# Altium PCB PCB1.PcbDoc
Units mm, origin at the board's own origin, x right, y up, seen from the top; angles counter-clockwise.
Board outline 171.32 x 126.62 mm, 2 copper layers (Top Layer, Bottom Layer); 40 components, 49 nets, 217 pads, 0 vias.
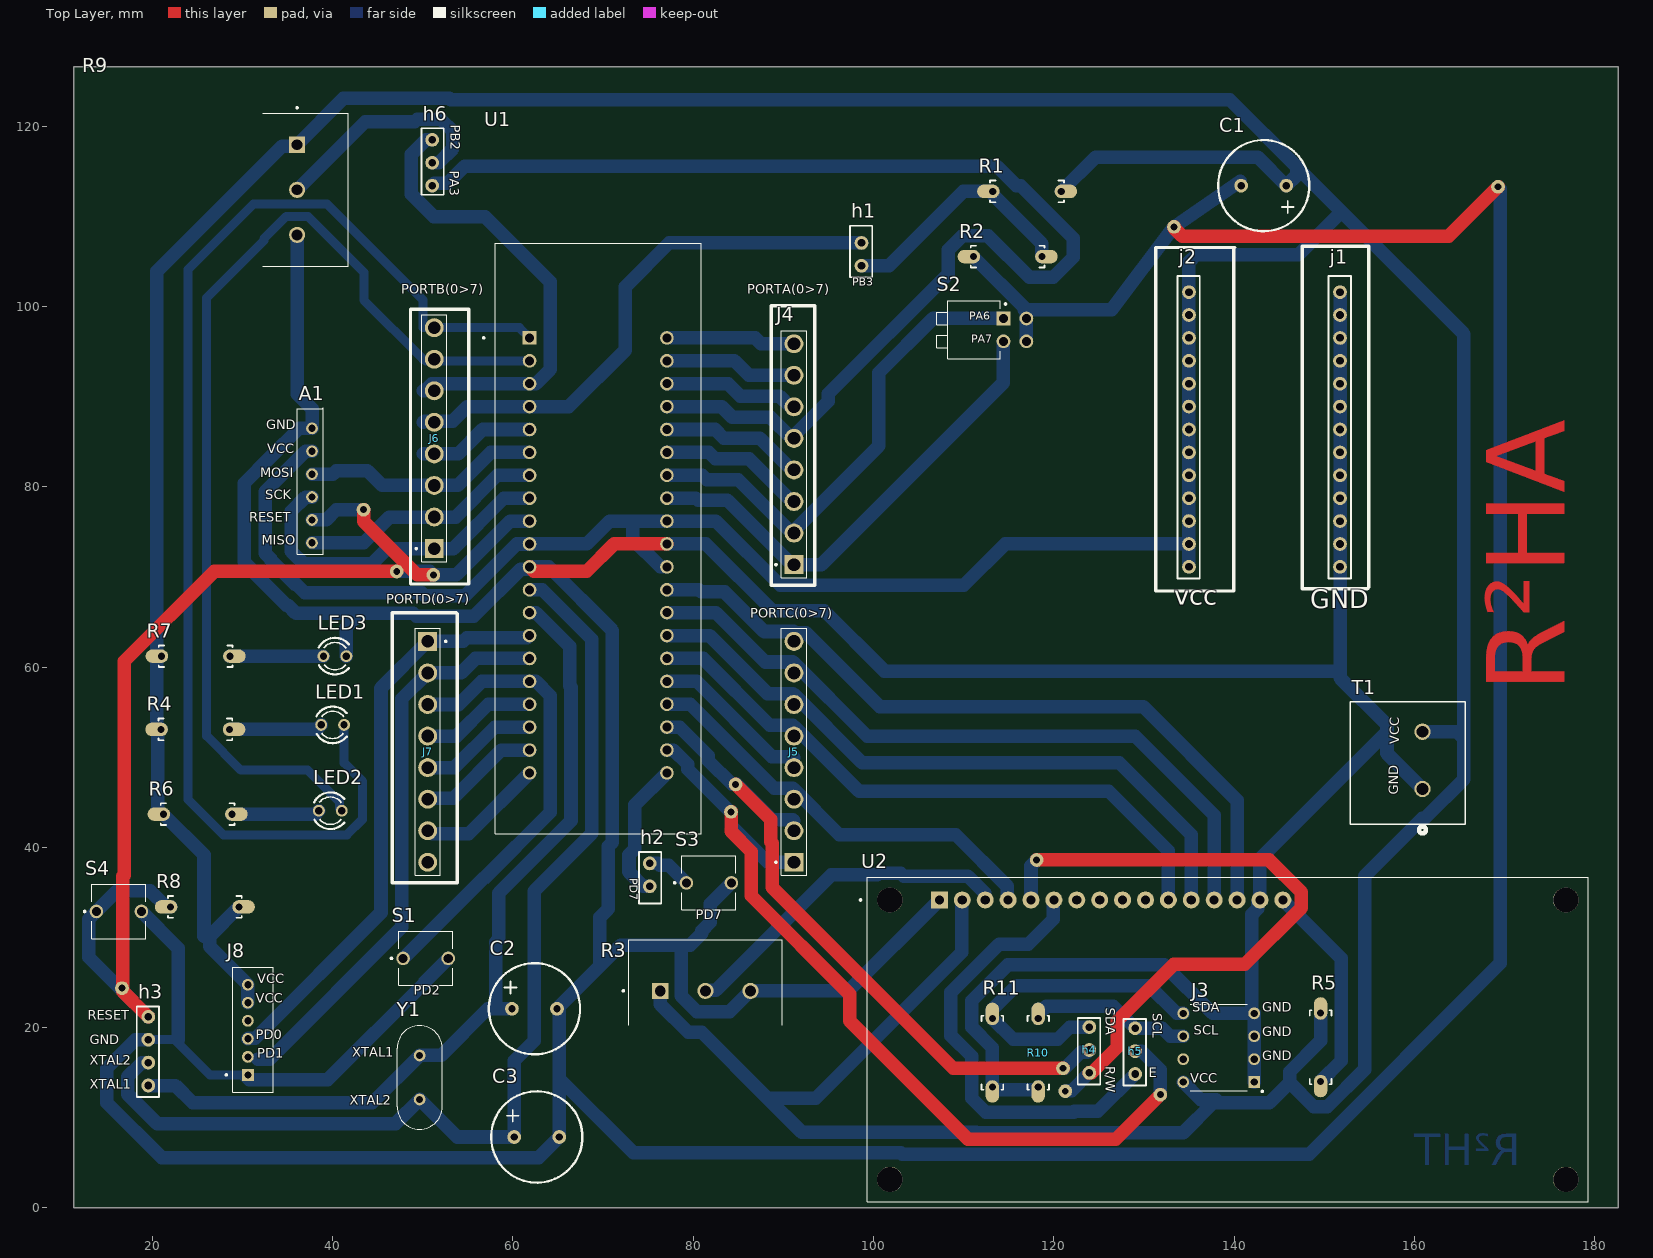
[diagram p0: Top Layer view]
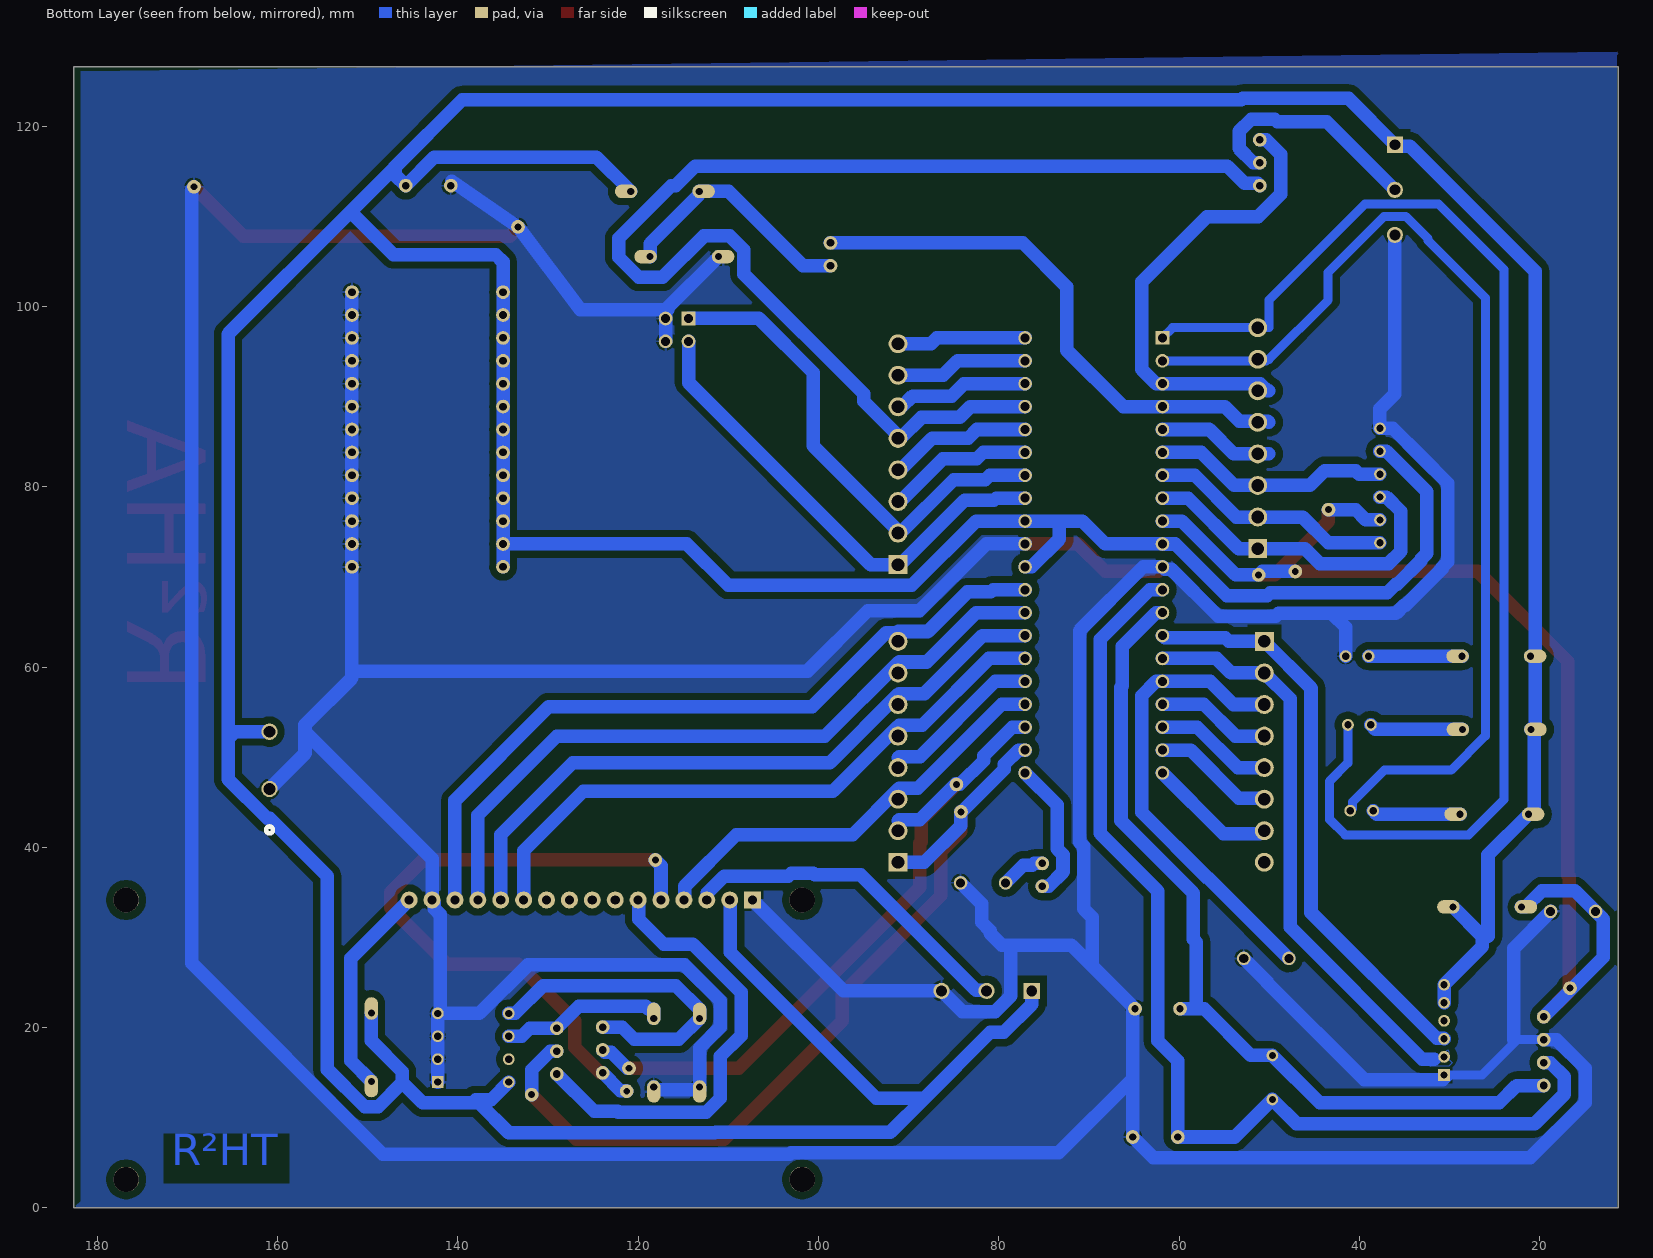
[diagram p1: Bottom Layer view, seen from below]

## Layer stack, top to bottom
Top Solder: solder mask 0.0102, Solder Resist, Dk 3.5
Top Layer: signal copper 0.0356
Dielectric 1: dielectric 0.32, FR-4, Dk 4.8
Bottom Layer: signal copper 0.0356
Bottom Solder: solder mask 0.0102, Solder Resist, Dk 3.5

## Board outline
11.303,0 182.626,0 182.626,126.619 11.303,126.619

## Design rules (kind name [scope] priority, off if disabled: settings)
Clearance [All] p1: gap=0.8 ignorepadtopadclearanceinfootprint=FALSE except(0.3: Arc-SMDPad Arc-THPad Track-SMDPad Track-THPad SMDPad-SMDPad SMDPad-THPad THPad-THPad)
ComponentClearance [All] p1: gap=0 collisioncheckmode=3 verticalgap=0 showdistances=TRUE donotcheckwithout3dbody=TRUE checkcomponentboundary=TRUE
PolygonConnect [All] p1: connectstyle=Relief reliefconductorwidth=0.254 reliefentries=4 polygonreliefangle="90 Angle" airgapwidth=0.254
RoutingVias [All] p1: holewidth=0.711 width=1.27 viastyle="Through Hole" minholewidth=0.711 minwidth=1.27 maxholewidth=0.711 maxwidth=1.27
SolderMaskExpansion [All] p1: expansion=0.102 istentingtop=FALSE
SupplyNets "Schematic Supply Nets" [InNet('GND')] p1: voltage=0.000
Width [All] p1: maxlimit=2 minlimit=0.254 preferedwidth=1.5 minimp=50.000000 maximp=50.000000 favimp=50.000000
29 further rules are at their usual default settings.

## Components (designator, comment, footprint, x,y, rotation, side; value= is the part's Value field where it differs from the comment)
A1 "AVR-ISP" AVR-ISP 36.449,76.327 r90 top
C1 "cap" cap 143.296,113.411 r180 top
C2 "cap" cap 62.397,22.098 r0 top
C3 "cap" cap 62.651,7.874 r0 top
h1 "header-3" Male_header_3 98.679,104.521 r90 top
h2 "header-3" Male_header_3 75.184,38.227 r270 top
h3 "header-5" Male_header_5 19.558,13.589 r90 top
h4 "header-4" Male_header_4 123.952,14.986 r90 top
h5 "header-4" Male_header_4 129.032,14.859 r90 top
h6 "header-4" Male_header_4 51.054,118.491 r270 top
j1 "header-12" "male header 8x2.54" 151.765,71.12 r90 top
j2 "header-12" "male header 8x2.54" 135.001,71.12 r90 top
J3 "24LC04B/P" DIP787W46P254L927H533Q8 138.303,17.78 r180 top
J4 "1986717-8" TE_1986717-8 91.186,83.624 r90 top
J5 "1986717-8" TE_1986717-8 91.186,50.604 r90 top
J6 "1986717-8" TE_1986717-8 51.283,85.402 r90 top
J7 "1986717-8" TE_1986717-8 50.546,50.604 r270 top
J8 "B6B-PH-K_1" JST_B6B-PH-K 31.157,19.764 r270 top
LED1 "TLLR4400" LED3MM 40.005,53.594 r0 top
LED2 "TLLR4400" LED3MM 39.751,44.069 r0 top
LED3 "TLLR4400" LED3MM 40.259,61.214 r0 top
R1 "1k" R_THT_CFR-25 114.046,112.776 r0 top
R2 "1k" R_THT_CFR-25 111.887,105.537 r0 top
R3 "PTN16-A50220K1B1" POT_PTN16-A50220K1B1 76.36,24.085 r0 top
R4 "1k" R_THT_CFR-25 21.775,53.086 r0 top
R5 "1k" R_THT_CFR-25 149.606,20.828 r270 top
R6 "1k" R_THT_CFR-25 22.029,43.688 r0 top
R7 "1k" R_THT_CFR-25 27.813,61.214 r180 top
R8 "1k" R_THT_CFR-25 28.829,33.401 r180 top
R9 "PTN16-A50220K1B1" POT_PTN16-A50220K1B1 36.068,117.95 r270 top
R10 "1k" R_THT_CFR-25 118.275,14.224 r90 top
R11 "1k" R_THT_CFR-25 113.195,14.224 r90 top
S1 "BUTT-2" SW_BUTT-2 50.332,27.686 r0 top
S2 "KAS2102E" SW_KAS2102E 115.697,97.409 r270 top
S3 "BUTT-2" SW_BUTT-2 81.748,36.068 r0 top
S4 "BUTT-2" SW_BUTT-2 16.296,32.893 r0 top
T1 "terminal 2" CONN2_0393800102_524X492_MOL 160.909,46.482 r270 top
U1 "ATMEGA32A-PU" 3M_240-1280-00-0602J 69.469,72.39 r0 top
U2 "LCD-16X2" MODULE_LCD-16X2 139.319,18.669 r0 top
Y1 "CA-18.432-18-3050-X" XTAL_CA-18.432-18-3050-X 49.657,14.478 r90 top

## Footprints (in the part's own frame and the unit in brackets; to place one, negate y for a bottom-side part, rotate by r counter-clockwise, add the part's x,y. Pads: shape width x height; smd on the part's side, far side on the other; paste and mask are expansions set on the pad)
3M_240-1280-00-0602J [mm]
  rect 1.508x1.508 / inner round 1.508 / far side rect 1.508x1.508 hole 1: 1(-7.62,24.13)
  round 1.508 hole 1: 2(-7.62,21.59) 3(-7.62,19.05) 4(-7.62,16.51) 5(-7.62,13.97) 6(-7.62,11.43) 7(-7.62,8.89) 8(-7.62,6.35) 9(-7.62,3.81) 10(-7.62,1.27) 11(-7.62,-1.27) 12(-7.62,-3.81) 13(-7.62,-6.35) 14(-7.62,-8.89) 15(-7.62,-11.43) 16(-7.62,-13.97) 17(-7.62,-16.51) 18(-7.62,-19.05) 19(-7.62,-21.59) 20(-7.62,-24.13) 21(7.62,-24.13) 22(7.62,-21.59) 23(7.62,-19.05) 24(7.62,-16.51) 25(7.62,-13.97) 26(7.62,-11.43) 27(7.62,-8.89) 28(7.62,-6.35) 29(7.62,-3.81) 30(7.62,-1.27) 31(7.62,1.27) 32(7.62,3.81) 33(7.62,6.35) 34(7.62,8.89) 35(7.62,11.43) 36(7.62,13.97) 37(7.62,16.51) 38(7.62,19.05) 39(7.62,21.59) 40(7.62,24.13)
  silkscreen extent -12.8,-30.87 11.45,34.63, body extent -11.62,-30.35 12.13,35.18, height 23.62
AVR-ISP [mm]
  round 1.308 hole 0.8: GND(10.16,-1.27) MISO(-2.54,-1.27) MOSI(5.08,-1.27) RST(0,-1.27) SCK(2.54,-1.27) VCC(7.62,-1.27)
  silkscreen extent -3.81,-2.54 12.45,0.38
cap [mm]
  round 1.524 hole 0.8: 1(-2.5,0) 2(2.5,0)
  silkscreen extent -5.06,-5.06 5.06,5.06, body extent -4.93,-5 5.06,5, height 12.5
CONN2_0393800102_524X492_MOL [mil]
  round 71 hole 51: 1(0,0) 2(-250,0)
  silkscreen extent -380,-316 194,186
DIP787W46P254L927H533Q8 [mm]
  rect 1.308x1.308 / inner round 1.308 / far side rect 1.308x1.308 hole 0.8 mask+0.102: 1(-3.935,3.81)
  round 1.308 hole 0.8 mask+0.102: 2(-3.935,1.27) 3(-3.935,-1.27) 4(-3.935,-3.81) 5(3.935,-3.81) 6(3.935,-1.27) 7(3.935,1.27) 8(3.935,3.81)
  silkscreen extent -4.95,-4.8 3.18,4.95, body extent -4.19,-4.89 4.19,4.89, height 4.32
JST_B6B-PH-K [mm]
  rect 1.308x1.308 / inner round 1.308 / far side rect 1.308x1.308 hole 0.8: 1(5,-0.55)
  round 1.308 hole 0.8: 2(3,-0.55) 3(1,-0.55) 4(-1,-0.55) 5(-3,-0.55) 6(-5,-0.55)
  silkscreen extent -6.95,-3.05 6.95,2.25, body extent -6.95,-2.8 6.95,1.7, height 6
LED3MM [mil]
  round 52 hole 32: A(-50,0) K(50,0)
  silkscreen extent -71,-80 61,80, body extent -60,-62 60,62, height 240
"male header 8x2.54" [mil]
  round 60 hole 33.46: 0(0,0) 1(100,0) 2(200,0) 3(300,0) 4(400,0) 5(500,0) 6(600,0) 7(700,0) 8(800,0) 9(900,0) 10(1000,0) 11(1100,0) 12(1200,0)
  silkscreen extent -50,-47 1270,50, body extent -324,-53 1249,49, height 348
Male_header_3 [mil]
  round 60 hole 33.46: 0(0,0) 1(100,0)
  silkscreen extent -50,-47 175,50
Male_header_4 [mil]
  round 60 hole 33.46: 0(0,0) 1(100,0) 2(200,0)
  silkscreen extent -50,-47 240,50
Male_header_5 [mil]
  round 60 hole 33.46: 0(0,0) 1(100,0) 2(200,0) 3(300,0)
  silkscreen extent -50,-47 345,50
MODULE_LCD-16X2 [mm]
  rect 1.88x1.88 / inner round 1.88 / far side rect 1.88x1.88 hole 1.016: 1(-32,15.5)
  round 1.88 hole 1.016: 2(-29.46,15.5) 3(-26.92,15.5) 4(-24.38,15.5) 5(-21.84,15.5) 6(-19.3,15.5) 7(-16.76,15.5) 8(-14.22,15.5) 9(-11.68,15.5) 10(-9.14,15.5) 11(-6.6,15.5) 12(-4.06,15.5) 13(-1.52,15.5) 14(1.02,15.5) 15(3.56,15.5) 16(6.1,15.5)
  round 2.8 hole 2.8 unplated: ""(-37.5,-15.5) ""(-37.5,15.5) ""(37.5,-15.5) ""(37.5,15.5)
  silkscreen extent -40.85,-18 40,18
POT_PTN16-A50220K1B1 [mm]
  rect 1.8x1.8 / inner round 1.8 / far side rect 1.8x1.8 hole 1.2: 1(0,0)
  round 1.8 hole 1.2: 2(5,0) 3(10,0)
  silkscreen extent -4.2,-3.81 13.5,5.69, body extent -7.3,-8.5 22.2,8.5, height 8.5
R_THT_CFR-25 [mm]
  oval 2.5x1.5 hole 0.8 copper offset -0.5,0: 1(-0.8,0)
  oval 2.5x1.5 hole 0.8 copper offset 0.5,0: 2(6.8,0)
  silkscreen extent -1.1,-1.2 7.1,1.2, body extent -1.08,-1.2 7.09,1.2, height 1.9
SW_BUTT-2 [mm]
  round 1.508 hole 1 mask+0.102: 1(-2.5,0) 2(2.5,0)
  silkscreen extent -3.9,-3 3,3, body extent -3,-3 3,3, height 5.1
SW_KAS2102E [mm]
  rect 1.53x1.53 / inner round 1.53 / far side rect 1.53x1.53 hole 1.02 mask+0.102: 1(-1.27,-1.27)
  round 1.53 hole 1.02 mask+0.102: 2(-1.27,1.27) 3(1.27,-1.27) 4(1.27,1.27)
  silkscreen extent -3.22,-8.67 3.22,-0.95, body extent -3.22,-4.13 3.22,5.91, height 4.95
TE_1986717-8 [mm]
  rect 2.1x2.1 / inner round 2.1 / far side rect 2.1x2.1 hole 1.4: 1(-12.25,0)
  round 2.1 hole 1.4: 2(-8.75,0) 3(-5.25,0) 4(-1.75,0) 5(1.75,0) 6(5.25,0) 7(8.75,0) 8(12.25,0)
  silkscreen extent -13.7,-1.4 13.7,2.1
XTAL_CA-18.432-18-3050-X [mm]
  round 1.308 hole 0.8 mask+0.102: 1(-2.44,0) 2(2.44,0)
  silkscreen extent -5.75,-2.5 5.75,2.5, body extent -5.75,-2.5 5.75,2.5, height 3.7

## Part data
A1: "Emulators / Simulators AVR USB IN CIRCUIT EMUL/PRGMR ISP", Package=None, Availability=Unavailable, MF=Gravitech, MP=AVR-ISP, Price=None, SnapEDA_Link=https://www.snapeda.com/parts/AVR-ISP/Gravitech/view-part/4593377/?ref=snap
J3: "4K, 512 X 8 2.5V SERIAL EEPROM", Package="DIP-8 Microchip", Check_prices=https://www.snapeda.com/parts/24LC04B/P/Microchip+Technology/view-part/?ref=eda, MF=Microchip, MP=24LC04B/P, SnapEDA_Link=https://www.snapeda.com/parts/24LC04B/P/Microchip+Technology/view-part/?ref=snap
J4 J5 J6 J7: "8 Position Terminal Block Header, Male Pins, Unshrouded 0.138 (3.50mm) Vertical - Through Hole", Package=None, Centerline_Pitch="3.5 mm[.138 in]", Check_prices=https://www.snapeda.com/parts/1986717-8/TE+Connectivity+AMP+Connectors/view-part/?ref=eda, MF="TE Connectivity", MP=1986717-8, Number_of_Positions=8, SnapEDA_Link=https://www.snapeda.com/parts/1986717-8/TE+Connectivity+AMP+Connectors/view-part/?ref=snap
J8: "Conn Shrouded Header (4 Sides) HDR 6 POS 2mm Solder ST Top Entry Thru-Hole Box", Package=None, Check_prices=https://www.snapeda.com/parts/B6B-PH-K/JST/view-part/?ref=eda, MF="JST Corporation", MP=B6B-PH-K, SnapEDA_Link=https://www.snapeda.com/parts/B6B-PH-K/JST/view-part/?ref=snap
LED1 LED2 LED3: "Red 619nm LED Indication - Discrete 1.9V Radial", Package=None, Check_prices=https://www.snapeda.com/parts/TLLR4400/Vishay+Semiconductor+Opto+Division/view-part/?ref=eda, MF=Vishay, MP=TLLR4400, SnapEDA_Link=https://www.snapeda.com/parts/TLLR4400/Vishay+Semiconductor+Opto+Division/view-part/?ref=snap
R1 R2 R4 R5 R6 R7 R8 R10 R11: library part "TH CFR-25 Resis", "CFR Series 0.25 W 1 KOhm ±5 % -350 to 500 ppm/°C Carbon Film Resistor", Case/Package=Axial, Manufacturer 1=Yageo, Manufacturer Part Number 1=CFR-25JB-52-1K, Max Operating Temperature=155°C, Max Power Dissipation=250mW, Min Operating Temperature=-55°C, Package Quantity=200, Resistance=1kR, Resistor Type="Carbon Film", Supplier Part Number 1=1.0KQBK-ND, Temperature Coefficient=500ppm/°C, Tolerance=5%, ComponentLink1Description=http://www.yageo.com/NewPortal/yageodocoutput?fileName=/pdf/throughhole/Yageo_LR_CFR_2013.pdf&src-supplier=Digi-Key, ComponentLink1URL=http://www.yageo.com/NewPortal/yageodocoutput?fileName=/pdf/throughhole/Yageo_LR_CFR_2013.pdf&src-supplier=Digi-Key, ComponentLink2Description=http://www.yageo.com/documents/recent/General%20Type_CFR.pdf?src-supplier=Future+Electronics, ComponentLink2URL=http://www.yageo.com/documents/recent/General%20Type_CFR.pdf?src-supplier=Future+Electronics, Lead Free="Lead Free", Length=0.248inch, Number of Terminations=2, Parameter Name 1=Bulk, Power Rating=250mW, Pricing 1="1=0.10000, 25=0.04680, 50=0.03640, 100=0.02600, 250=0.02028, 500=0.01612, 750=0.01379, 1000=0.01144, 2000=0.00988 (USD)", RoHS=Yes, Stock 1=194074, Supplier 1=Digi-Key
R3 R9: "16.5 mm, Horizontal, Linear, 50 kÎ©, Through Hole, Knurled Shaft Single Section Rotary Potentiometer", Package=Package, Check_prices=https://www.snapeda.com/parts/PTN16-A50220K1B1/Same+Sky/view-part/?ref=eda, MF="Same Sky", MP=PTN16-A50220K1B1, SnapEDA_Link=https://www.snapeda.com/parts/PTN16-A50220K1B1/Same+Sky/view-part/?ref=snap
S1 S3 S4: "Tactile Switches MINI PUSH BUTTON SWITCH 2-PIN QTY. 4", Package=None, Check_prices=https://www.snapeda.com/parts/BUTT-2/Gravitech/view-part/?ref=eda, MF=Gravitech, MP=BUTT-2, SnapEDA_Link=https://www.snapeda.com/parts/BUTT-2/Gravitech/view-part/?ref=snap
S2: "Dip Switch SPST 2 Position Through Hole, Right Angle Slide (Standard) Actuator 25mA 24VDC", Package=None, Check_prices=https://www.snapeda.com/parts/KAS2102E/E-Switch/view-part/?ref=eda, MF=E-Switch, MP=KAS2102E, SnapEDA_Link=https://www.snapeda.com/parts/KAS2102E/E-Switch/view-part/?ref=snap
T1: Flammability Rating="UL94 V-0", LCSC Part Number=C6045317, Manufacturer=Samtec, Manufacturer Part Number=FTS-102-01-F-S, Manufacturer Series=FTS, Supplier Part Number=SAM15176-ND, Additional Feature="Low Profile", Category=Connectors, ComponentLink1Description=https://datasheet.ciiva.com:443/pdfs/VipMasterIC/IC/SAMI/SAMI-S-A0001504673/SAMI-S-A0001504673-1.pdf?src-supplier=IHS+Markit, ComponentLink1URL=https://datasheet.ciiva.com:443/pdfs/VipMasterIC/IC/SAMI/SAMI-S-A0001504673/SAMI-S-A0001504673-1.pdf?src-supplier=IHS+Markit, ComponentLink2Description=http://www.samtec.com/documents/webfiles/pdf/FTS.pdf?src-supplier=Avnet, ComponentLink2URL=http://www.samtec.com/documents/webfiles/pdf/FTS.pdf?src-supplier=Avnet, Connector Type="BOARD CONNECTOR", Contact Finish - Mating="GOLD (3) OVER NICKEL (50)", Contact Finish - Termination="Matte Tin (Sn) - with Nickel (Ni) barrier", Contact Gender=Male, Contact Material=Bronze, DIN Conformance=No, Filter Feature=No, IEC Conformance=No, JESD-609 Code=e3, MIL Conformance=No, Mixed Contacts=No, Mounting Style=STRAIGHT, Mounting Technology=Board, Number of Contacts=2, Number of Rows Loaded=1, Option="General Purpose", Pricing="1=0.68, 10=0.592, 100=0.4878, 500=0.4242, 1000=0.34996, 5000=0.30754, 10000=0.28634 (USD)", Reach SVHC Compliant=Yes, RoHS=Yes, RoHS Compliant=Yes, Stock=1204, Supplier=Digikey, Terminal Pitch=1.27mm, Termination=Solder
U1: "AVR AVRÂ® ATmega Microcontroller IC 8-Bit 16MHz 32KB (16K x 16) FLASH 40-PDIP", Package="PDIP-40 Microchip", Check_prices=https://www.snapeda.com/parts/ATMEGA32A-PU/Microchip/view-part/?ref=eda, MF=Microchip, MP=ATMEGA32A-PU, SnapEDA_Link=https://www.snapeda.com/parts/ATMEGA32A-PU/Microchip/view-part/?ref=snap
U2: "Display Development Tools 16x2 Black on Green Char LCD w Backlight", Package=None, Check_prices=https://www.snapeda.com/parts/LCD-16X2/Gravitech/view-part/?ref=eda, MF=Gravitech, MP=LCD-16X2, SnapEDA_Link=https://www.snapeda.com/parts/LCD-16X2/Gravitech/view-part/?ref=snap
Y1: "Quartz Crystal, HC-49/U-S Short Package", Package=None, Check_prices=https://www.snapeda.com/parts/CA-18.432-18-3050-X/Aker/view-part/?ref=eda, MF=Aker, MP=CA-18.432-18-3050-X, SnapEDA_Link=https://www.snapeda.com/parts/CA-18.432-18-3050-X/Aker/view-part/?ref=snap

## Free pads (board coordinates)
  round 1.524 hole 0.762: 2(169.291,113.284) 3(84.709,46.99) 4(84.201,43.942) 5(131.826,12.573) 6(121.031,15.494) 7(121.285,12.954) 8(133.35,108.839) 9(43.434,77.47) 10(51.181,70.231) 11(47.117,70.612) 12(16.637,24.384) 13(118.11,38.608)

## Nets (pads, with @x,y where several pads share a name; then routed paths per layer and width w, separated by ;. In a path a pad name is that pad's centre, name@x,y a point inside that pad or via, vN(x,y) a via of type N, cw(c..) or ccw(c..) an arc to the next point about the centre after c; other vN are vias at no path point)
E: h5.0 U2.6 | length 50.1
  Bottom Layer w1.5: U2.6 119.946,34.096 119.946,32.028 117.184,29.266 113.932,29.266 108.595,23.929 108.595,19.119 110.895,16.819 110.895,12.178 112.45,10.624 122.208,10.624 122.303,10.719 124.892,10.719 h5.0
GND: A1.GND C1.2 C2.2 C3.2 h3.2 j1.0 j1.1 j1.2 j1.3 j1.4 j1.5 j1.6 j1.7 j1.8 j1.9 j1.10 j1.11 j1.12 J3.1 J3.2 J3.3 J3.4 J8.1 LED3.K pad.2 pad.8 R2.1 R3.3 R9.3 R10.1 R11.1 S1.2 S2.2 S2.4 S3.2 S4.2 T1.1 U1.11 U1.31 U2.1 U2.15 | length 870.6
  Top Layer w1.5: U1.11 61.851,71.12 62.341,70.63 68.198,70.63 71.228,73.66 U1.31 ; pad.8 133.355,108.834 133.355,108.709 134.241,107.823 163.83,107.823 pad.2
  Bottom Layer w1: h3.2 22.86,18.669 ; 22.479,18.669 26.384,14.764 J8.1
  Bottom Layer w1.5: S4.2 22.86,28.829 22.86,18.669 ; h3.2 19.553,18.664 18.128,18.664 14.958,15.494 14.958,11.684 21.068,5.574 62.851,5.574 C3.2 65.151,14.351 ; J8.1@30.412,14.569 30.767,14.214 39.447,14.214 50.221,24.988 50.221,25.075 S1.2 ; R9.3 36.068,90.297 37.719,88.646 A1.GND 36.294,86.487 33.119,83.312 30.212,80.405 30.212,71.691 30.819,71.084 30.819,70.929 34.861,66.887 35.016,66.887 35.951,65.952 43.053,65.952 ; LED3.K 41.529,64.428 43.053,65.952 ; U1.31 81.412,73.66 88.82,66.252 94.53,66.252 101.219,59.563 151.765,59.563 ; S3.2 81.911,33.731 81.911,31.699 80.979,30.767 80.979,30.473 79.654,29.148 78.294,29.148 ; U2.1 97.235,24.085 R3.3 84.06,21.785 80.407,21.785 78.66,23.532 78.66,28.782 78.294,29.148 ; R2.1 116.961,99.663 116.961,98.685 S2.2 S2.4 ; 116.725,99.634 126.431,99.634 pad.8 C1.2@140.716,113.919 ; R10.1 118.275,13.131 113.195,13.131 R11.1 113.195,17.771 110.895,20.071 110.895,22.977 114.884,26.966 117.248,26.966 132.245,26.966 137.621,21.59 J3.4 ; J3.1 J3.2 J3.3 J3.4 ; j1.12 j1.11 j1.10 j1.9 j1.8 j1.7 j1.6 j1.5 j1.4 j1.3 j1.2 j1.1 j1.0 151.765,59.563 ; T1.1 156.972,50.419 156.972,52.832 ; pad.2 169.291,113.278 169.545,113.024 169.545,27.169 148.345,5.969 103.191,5.969 103.041,6.119 73.383,6.119 65.151,14.351 ; 43.053,65.952 48.955,65.952 49.276,65.631 55.647,65.631 60.896,70.88 61.607,70.88 61.847,71.12 U1.11 61.851,71.118 63.989,71.118 71.049,64.058 71.049,40.597 70.584,40.132 70.584,33.168 69.647,32.231 69.647,26.848 ; 65.151,14.351 65.151,21.838 64.897,22.092 C2.2 69.647,26.848 ; 69.647,26.848 71.947,29.148 78.294,29.148 ; J3.4 141.986,21.842 141.986,32.563 142.639,33.216 142.639,33.826 142.879,34.066 142.879,38.739 156.972,52.832 ; 151.765,59.563 151.765,58.801 156.972,53.594 156.972,52.832
Neth1_0: h1.0 R1.1 R2.2 | length 27.5
  Bottom Layer w1.5: h1.0 101.727,104.521 109.982,112.776 R1.1 113.246,112.433 118.687,106.992 R2.2
Neth2_0: h2.0 S3.1 | length 5
  Bottom Layer w1.5: h2.0 75.189,38.222 76.078,38.222 76.276,38.024 77.29,38.024 79.246,36.068 S3.1
Neth6_1: h6.1 R9.2 | length 26
  Bottom Layer w1.5: R9.2 43.627,120.509 49.107,120.509 49.389,120.791 52.007,120.791 53.354,119.444 53.354,117.538 51.771,115.956 51.059,115.956 h6.1
NetLED1_A: LED1.A R4.2 | length 10.4
  Bottom Layer w1.5: R4.2 38.227,53.086 LED1.A
NetLED2_A: LED2.A R6.2 | length 9.8
  Bottom Layer w1.5: R6.2 38.1,43.688 LED2.A
NetLED3_A: LED3.A R7.1 | length 10.4
  Bottom Layer w1.5: R7.1 LED3.A
NetR3_2: R3.2 U2.3 | length 38.1
  Bottom Layer w1.5: R3.2 81.417,24.142 82.532,24.142 95.346,36.957 100.435,36.957 100.597,37.119 103.041,37.119 103.367,36.793 110.488,36.793 112.326,34.954 112.326,34.242 U2.3
NetR5_2: R5.2 U2.16 | length 23.8
  Bottom Layer w1.5: U2.16 151.906,27.682 151.906,16.328 R5.2
PA0: J4.8 U1.40 | length 14.1
  Bottom Layer w1.5: U1.40 86.882,96.52 87.528,95.874 J4.8@90.932,95.874
PA1: J4.7 U1.39 | length 14.5
  Bottom Layer w1.5: U1.39 84.582,93.98 86.188,92.374 J4.7@90.932,92.374
PA2: J4.6 U1.38 | length 14.9
  Bottom Layer w1.5: U1.38 83.869,91.44 85.235,90.074 89.57,90.074 90.77,88.874 J4.6@90.932,88.874
PA3: h6.2 J4.5 U1.37 | length 138.1
  Bottom Layer w1.5: h6.2 51.06,113.411 51.3,113.651 52.719,113.651 54.638,115.57 113.705,115.57 115.864,113.411 116.332,113.411 122.174,107.569 122.174,105.478 119.933,103.237 117.313,103.237 112.713,107.837 109.841,107.837 108.287,106.283 108.287,103.603 94.998,90.314 94.998,89.504 91.486,85.992 91.486,85.836 91.186,85.536 J4.5 ; U1.37 83.157,88.9 84.357,87.7 88.591,87.7 90.917,85.374 J4.5@90.932,85.374
PA4: J4.4 U1.36 | length 15.7
  Bottom Layer w1.5: U1.36 82.444,86.36 83.404,85.4 87.406,85.4 J4.4@90.932,81.874
PA5: J4.3 U1.35 | length 16.1
  Bottom Layer w1.5: U1.35 81.731,83.82 82.451,83.1 86.206,83.1 J4.3@90.932,78.374
PA6: J4.2 S2.1 U1.34 | length 54.6
  Bottom Layer w1.5: U1.34@77.091,81.28 81.019,81.28 81.499,80.8 85.006,80.8 90.932,74.874 100.592,84.533 100.592,92.655 106.616,98.679 S2.1
PA7: J4.1 S2.3 U1.33 | length 53.3
  Bottom Layer w1.5: U1.33 80.306,78.74 80.546,78.5 83.806,78.5 90.932,71.374 94.232,71.374 114.427,91.569 S2.3
PB0: J6.8 LED1.K U1.1 | length 140.6
  Bottom Layer w1: LED1.K 41.275,49.378 43.321,47.332 43.321,43.116 41.593,41.388 27.876,41.388 23.975,45.289 23.975,51.181 23.975,76.954 23.975,104.112 31.225,111.362 39.387,111.362 50.038,100.711 50.038,97.652 60.717,97.652 U1.1
PB1: J6.7 LED2.K U1.2 | length 115.5
  Bottom Layer w1: LED2.K 40.781,44.309 40.781,45.022 37.225,48.578 29.831,48.578 26.035,52.373 26.035,100.965 32.385,107.315 32.385,107.52 34.863,109.998 37.273,109.998 43.472,103.799 43.472,100.718 50.038,94.152 50.2,94.152 50.372,93.98 U1.2
PB2: h6.0 J6.6 U1.3 | length 51.6
  Bottom Layer w1.5: 50.038,90.652 50.2,90.652 50.988,91.44 U1.3 61.851,91.442 62.563,91.442 64.149,93.027 64.149,102.729 56.91,109.968 51.244,109.968 48.754,112.458 48.754,116.904 50.337,118.486 51.049,118.486 h6.0
PB3: h1.1 J6.5 U1.4 | length 61
  Bottom Layer w1.5: 50.038,87.152 50.153,87.267 53.315,87.267 54.948,88.9 U1.4 66.216,88.9 72.489,95.173 72.489,102.207 77.343,107.061 h1.1
PB4: J6.4 U1.5 | length 12.9
  Bottom Layer w1.5: 50.038,83.652 53.934,83.652 56.642,86.36 U1.5
PB5: A1.MOSI J6.3 U1.6 | length 26.5
  Bottom Layer w1.5: A1.MOSI 40.042,81.407 40.423,81.788 43.868,81.788 45.504,80.152 50.038,80.152 53.899,80.152 57.567,83.82 U1.6
PB6: A1.MISO J6.2 U1.7 | length 27.2
  Bottom Layer w1.5: A1.MISO 43.444,73.787 46.309,76.652 50.038,76.652 53.658,76.652 58.284,81.278 61.847,81.278 U1.7
PB7: A1.SCK J6.1 U1.8 | length 37.4
  Bottom Layer w1.5: A1.SCK 37.006,78.867 35.419,77.28 35.419,72.834 36.766,71.487 44.397,71.487 46.062,73.152 50.038,73.152 53.41,73.152 58.997,78.738 61.847,78.738 U1.8
PC0: h5.1 J5.1 pad.4 pad.5 U1.22 | length 97.4
  Top Layer w1.5: pad.4 84.201,41.783 86.451,39.533 86.451,34.629 97.348,23.733 97.348,20.762 110.49,7.62 126.873,7.62 pad.5
  Bottom Layer w1.5: U1.22 77.091,50.798 77.803,50.798 79.389,49.213 79.389,48.676 84.119,43.947 84.196,43.947 pad.4 84.201,42.418 88.265,38.354 J5.1@91.087,38.354 ; h5.1 129.037,17.394 129.749,17.394 131.821,15.322 131.821,12.578 pad.5
PC1: h4.1 J5.2 pad.3 pad.6 U1.23 | length 76.1
  Top Layer w1.5: pad.3 88.586,43.113 88.586,40.651 88.751,40.486 88.751,35.582 108.839,15.494 pad.6
  Bottom Layer w1.5: U1.23 77.091,53.338 78.516,53.338 81.689,50.165 81.689,49.629 84.323,46.995 84.704,46.995 pad.3 ; pad.3@84.787,47.068 88.788,43.067 91.071,43.067 91.186,42.952 ; pad.6 121.036,15.499 121.212,15.499 122.999,17.286 123.706,17.286 123.941,17.521 h4.1@123.947,17.521
PC2: J5.3 U1.24 U2.4 | length 47.7
  Bottom Layer w1.5: U1.24 77.091,55.878 79.678,55.878 88.989,46.567 91.071,46.567 96.222,41.416 109.117,41.416 114.866,35.667 114.866,34.242 U2.4
PC3: J5.4 U1.25 | length 17.6
  Bottom Layer w1.5: U1.25 80.389,58.42 88.742,50.067 91.071,50.067 91.186,49.952
PC4: J5.5 U1.26 U2.11 | length 69.7
  Bottom Layer w1.5: U1.26 81.102,60.96 88.495,53.567 91.071,53.567 ; 91.186,53.452 98.41,46.228 126.111,46.228 132.719,39.62 U2.11@132.719,34.272
PC5: J5.6 U1.27 U2.12 | length 74.6
  Bottom Layer w1.5: U1.27 81.814,63.5 88.248,57.067 91.071,57.067 98.735,49.403 127.254,49.403 135.259,41.398 U2.12
PC6: J5.7 U1.28 U2.13 | length 79.4
  Bottom Layer w1.5: U1.28 82.527,66.04 88,60.567 91.071,60.567 99.314,52.324 129.032,52.324 137.799,43.557 U2.13
PC7: J5.8 U1.29 U2.14 | length 84
  Bottom Layer w1.5: U1.29 80.645,68.58 80.885,68.34 83.48,68.34 87.868,63.952 91.186,63.952 91.301,63.837 92.5,63.837 100.711,55.626 129.921,55.626 140.339,45.208 U2.14
PD0: J7.1 J8.3 U1.14 | length 64.4
  Bottom Layer w1.5: J8.3 30.657,18.814 31.415,18.814 45.371,32.77 45.371,57.679 J7.1 54.495,62.854 54.901,63.26 61.607,63.26 61.847,63.5 U1.14
PD1: J7.2 J8.2 U1.15 | length 63.4
  Bottom Layer w1: 31.72,16.514 31.727,16.521 31.749,16.521
  Bottom Layer w1.5: 31.72,16.514 33.024,16.514 47.671,31.161 47.671,56.479 J7.2 54.247,59.354 55.853,60.96 U1.15
PD2: J7.3 S1.1 U1.16 | length 51.3
  Bottom Layer w1.5: S1.1 56.652,36.505 56.739,36.505 64.149,43.916 64.149,56.833 62.563,58.418 61.851,58.418 U1.16 56.566,58.42 54,55.854 J7.3
PD3: J7.4 U1.17 | length 12.8
  Bottom Layer w1.5: J7.4 53.753,52.354 57.279,55.88 U1.17
PD4: J7.5 U1.18 | length 13.2
  Bottom Layer w1.5: J7.5 53.505,48.854 57.991,53.34 U1.18
PD5: J7.6 U1.19 | length 13.6
  Bottom Layer w1.5: J7.6 50.661,45.469 53.373,45.469 58.704,50.8 U1.19
PD6: J7.7 U1.20 | length 14.2
  Bottom Layer w1.5: J7.7 50.708,41.854 51.033,41.529 55.118,41.529 U1.20
PD7: h2.1 U1.21 | length 15.7
  Bottom Layer w1.5: h2.1 75.179,35.692 74.467,35.692 72.884,37.274 72.884,39.18 73.533,39.829 73.533,44.704 U1.21
R/W: h4.0 pad.7 pad.13 U2.5 | length 73.6
  Top Layer w1.5: pad.13 143.89,38.608 147.477,35.021 147.477,33.317 141.197,27.037 133.337,27.037 127.057,20.757 127.057,17.838 124.21,14.991 123.957,14.991 h4.0
  Bottom Layer w1.5: U2.5 117.479,37.971 118.11,38.602 pad.13 ; pad.7 121.291,12.954 121.357,13.019 121.985,13.019 h4.0
RESET: A1.RST h3.3 pad.9 pad.10 pad.11 pad.12 R8.2 S4.1 U1.9 | length 134.8
  Top Layer w1.5: h3.3 16.746,24.021 16.746,24.384 16.746,36.786 16.891,36.931 16.891,60.638 26.865,70.612 pad.11 ; pad.9 43.434,76.171 49.369,70.236 51.176,70.236 pad.10
  Bottom Layer w1.5: h3.3 12.954,27.813 12.954,32.049 13.796,32.891 S4.1 16.096,35.193 19.749,35.193 21.541,33.401 R8.2 ; A1.RST 39.285,76.327 40.423,77.465 43.429,77.465 pad.9 ; pad.11 50.794,70.612 51.175,70.231 pad.10 51.186,70.236 53.747,70.236 55.563,72.052 59.709,76.198 61.847,76.198 U1.9
SCL: h5.2 J3.6 R10.2 | length 18.6
  Bottom Layer w1.5: R10.2 118.275,22.024 118.812,22.024 119.154,22.366 126.605,22.366 h5.2 129.037,19.934 132.043,19.934 132.927,19.05 J3.6
SDA: h4.2 J3.5 R11.2 | length 36.8
  Bottom Layer w1.5: h4.2 123.947,20.061 121.788,20.061 120.451,18.724 115.495,18.724 R11.2 113.195,22.024 115.837,24.666 118.201,24.666 130.564,24.666 133.64,21.59 J3.5
VCC: A1.VCC C1.1 j2.0 j2.1 j2.2 j2.3 j2.4 j2.5 j2.6 j2.7 j2.8 j2.9 j2.10 j2.11 j2.12 J3.8 J8.5 J8.6 R1.2 R3.1 R4.1 R5.1 R6.1 R7.2 R8.1 R9.1 T1.2 U1.10 U1.30 U1.32 U2.2 | length 702.1
  Bottom Layer w1.5: R4.1 R4.1@20.602,53.086 ; R7.2 R7.2@20.513,61.214 ; 25.736,30.124 25.736,39.181 R6.1 20.602,43.688 R4.1@20.602,53.086 ; R8.1 26.352,30.124 26.352,29.019 J8.6 J8.5 ; A1.VCC 37.006,83.947 32.512,79.453 32.512,72.644 33.119,72.037 33.119,71.882 35.814,69.187 35.969,69.187 36.904,68.252 49.907,68.252 50.228,67.931 54.695,67.931 60.422,73.658 61.847,73.658 U1.10 ; U1.10@61.852,73.659 61.853,73.66 68.199,73.66 70.739,76.2 73.279,76.2 ; R3.1 76.36,22.58 79.455,19.485 80.96,19.485 88.259,12.186 ; U1.30 77.087,71.122 76.375,71.122 73.279,74.217 73.279,76.2 ; U2.2 109.786,34.096 109.786,28.379 93.593,12.186 88.259,12.186 ; R1.2 124.656,116.586 142.621,116.586 C1.1 145.796,113.417 146.978,114.599 146.978,115.482 ; J3.8 136.318,12.02 138.049,12.02 137.699,11.67 ; j2.0 j2.1 ; R5.1 149.606,18.545 146.175,15.115 146.175,13.913 ; T1.2 164.747,52.832 165.509,52.07 ; R7.2@20.513,61.214 20.513,103.903 34.41,117.8 35.918,117.8 R9.1 41.209,123.091 52.959,123.091 53.114,122.936 139.524,122.936 146.978,115.482 ; R7.2@20.513,61.214 20.494,61.214 20.494,53.086 R4.1@20.602,53.086 ; 73.279,76.2 82.521,76.2 89.647,69.074 110.025,69.074 114.611,73.66 j2.1 ; 88.259,12.186 92.026,8.419 111.402,8.419 111.497,8.324 134.353,8.324 137.699,11.67 ; j2.1 j2.2 j2.3 j2.4 j2.5 j2.6 j2.7 j2.8 j2.9 j2.10 j2.11 j2.12 135.001,104.951 135.802,105.752 147.154,105.752 151.931,110.529 ; 137.699,11.67 143.932,11.67 146.175,13.913 ; 146.175,13.913 148.86,11.228 150.352,11.228 154.48,15.357 154.48,36.801 160.904,43.225 161.158,43.225 165.509,47.575 165.509,52.07 ; 146.978,115.482 147.419,115.041 151.931,110.529 ; 151.931,110.529 165.509,96.951 165.509,52.07
XTAL1: C2.1 h3.0 U1.13 Y1.2 | length 95.2
  Bottom Layer w1.5: h3.0 19.563,13.584 22.569,13.584 24.483,11.67 44.409,11.67 Y1.2 52.05,16.918 57.225,22.093 58.119,22.093 ; C2.1 58.119,22.098 58.119,29.495 58.42,29.796 58.42,34.934 66.449,42.963 66.449,57.785 66.294,57.94 66.294,62.308 62.563,66.038 61.851,66.038 U1.13
XTAL2: C3.1 h3.1 U1.12 Y1.1 | length 119.9
  Bottom Layer w1.5: h3.1 19.553,16.124 18.841,16.124 17.258,14.542 17.258,12.636 20.524,9.37 46.989,9.37 Y1.1 53.821,7.874 C3.1 60.151,16.336 62.357,18.542 62.357,35.158 68.749,41.55 68.749,63.105 63.276,68.578 61.851,68.578 U1.12
pads on no net: J3.7 J7.8 J8.4 U2. U2.7 U2.8 U2.9 U2.10

## Polygon pours and split planes (outlines as drawn)
GND on Bottom Layer "GND_L02_P002" (solid, remove dead copper, pour order 2): 11.049,128.27 11.43,127.889 11.43,0 182.626,0 181.864,0.762 181.864,126.111
no net on Bottom Layer "NONET_L02_P000" (solid, pour order 0): 30.099,17.399 30.099,16.51 29.718,16.129 30.099,15.748 32.131,15.748 31.877,16.002 31.877,17.018 30.734,17.018 30.226,17.526

## Other copper
Top Layer:
  text "R²HA" at 179.578,57.15 h15 r90
Bottom Layer:
  text "R²HT" at 171.831,3.556 h6

## Silkscreen, mask and mechanical layers (free items; w line width, h text height)
Top Overlay:
  lines w0.37: 46.609,36.068 53.848,36.068 53.848,65.913 53.721,66.04 46.609,66.04 46.609,36.068 ; 48.641,69.215 48.641,99.695 55.118,99.695 55.118,69.215 48.641,69.215 ; 88.646,69.088 93.472,69.088 93.472,100.076 88.646,100.076 88.646,69.088 ; 131.318,68.453 139.954,68.453 139.954,106.426 140.081,106.553 131.318,106.553 131.318,69.596 131.318,68.453 ; 147.574,68.707 154.813,68.707 154.94,68.834 154.94,106.68 147.574,106.68 147.574,68.707
  text "PB2" at 52.705,120.142 h1.8 r270
  text "PA3" at 52.598,115.062 h1.8 r270
  text "PB3" at 97.663,101.998 h1.52
  text "PORTB(0>7)" at 47.625,101.05 h1.8
  text "PORTA(0>7)" at 85.979,101.05 h1.8
  text "PA6" at 110.617,98.187 h1.52
  text "PA7" at 110.871,95.631 h1.52
  text "GND" at 32.639,85.998 h1.8
  text "VCC" at 32.767,83.331 h1.8
  text "MOSI" at 32.004,80.664 h1.8
  text "SCK" at 32.512,78.251 h1.8
  text "RESET" at 30.734,75.711 h1.8
  text "MISO" at 32.131,73.171 h1.8
  text "PORTD(0>7)" at 45.974,66.633 h1.8
  text "vcc" at 133.35,66.204 h3.52
  text "GND" at 148.463,65.823 h3.52
  text "PORTC(0>7)" at 86.36,65.109 h1.8
  text "VCC" at 158.731,51.436 h1.8 r90
  text "GND" at 158.604,45.847 h1.8 r90
  text "PD7" at 72.644,36.576 h1.52 r270
  text "PD7" at 80.264,31.623 h1.8
  text "VCC" at 31.624,24.53 h1.8
  text "PD2" at 49.022,23.241 h1.8
  text "VCC" at 31.497,22.371 h1.8
  text "SDA" at 125.368,22.225 h1.8 r270
  text "SCL" at 130.575,21.59 h1.8 r270
  text "SDA" at 135.382,21.355 h1.8
  text "GND" at 143.129,21.355 h1.8
  text "RESET" at 12.827,20.466 h1.8
  text "SCL" at 135.509,18.815 h1.8
  text "GND" at 143.129,18.688 h1.8
  text "PD0" at 31.496,18.307 h1.8
  text "GND" at 13.081,17.799 h1.8
  text "XTAL1" at 42.165,16.383 h1.8
  text "PD1" at 31.623,16.256 h1.8
  text "GND" at 143.129,16.021 h1.8
  text "R/W" at 125.369,15.748 h1.8 r270
  text "XTAL2" at 13.082,15.494 h1.8
  text "E" at 130.556,14.097 h1.8
  text "VCC" at 135.129,13.481 h1.8
  text "XTAL1" at 13.082,12.827 h1.8
  text "XTAL2" at 41.911,11.049 h1.8

## Text inside footprints (layer, text, board x,y; h text height)
R3: Mechanical 13 "PCB Edge" at 90.61,20.585 h0.9
R9: Mechanical 13 "PCB Edge" at 32.568,103.7 h0.9 r270